# Altium PCB PCB1.PcbDoc
Units mil, origin at the board's own origin, x right, y up, seen from the top; angles counter-clockwise.
Board outline 2362.2 x 1338.58 mil, 2 copper layers (Top Layer, Bottom Layer); 19 components, 16 nets, 62 pads, 11 vias.
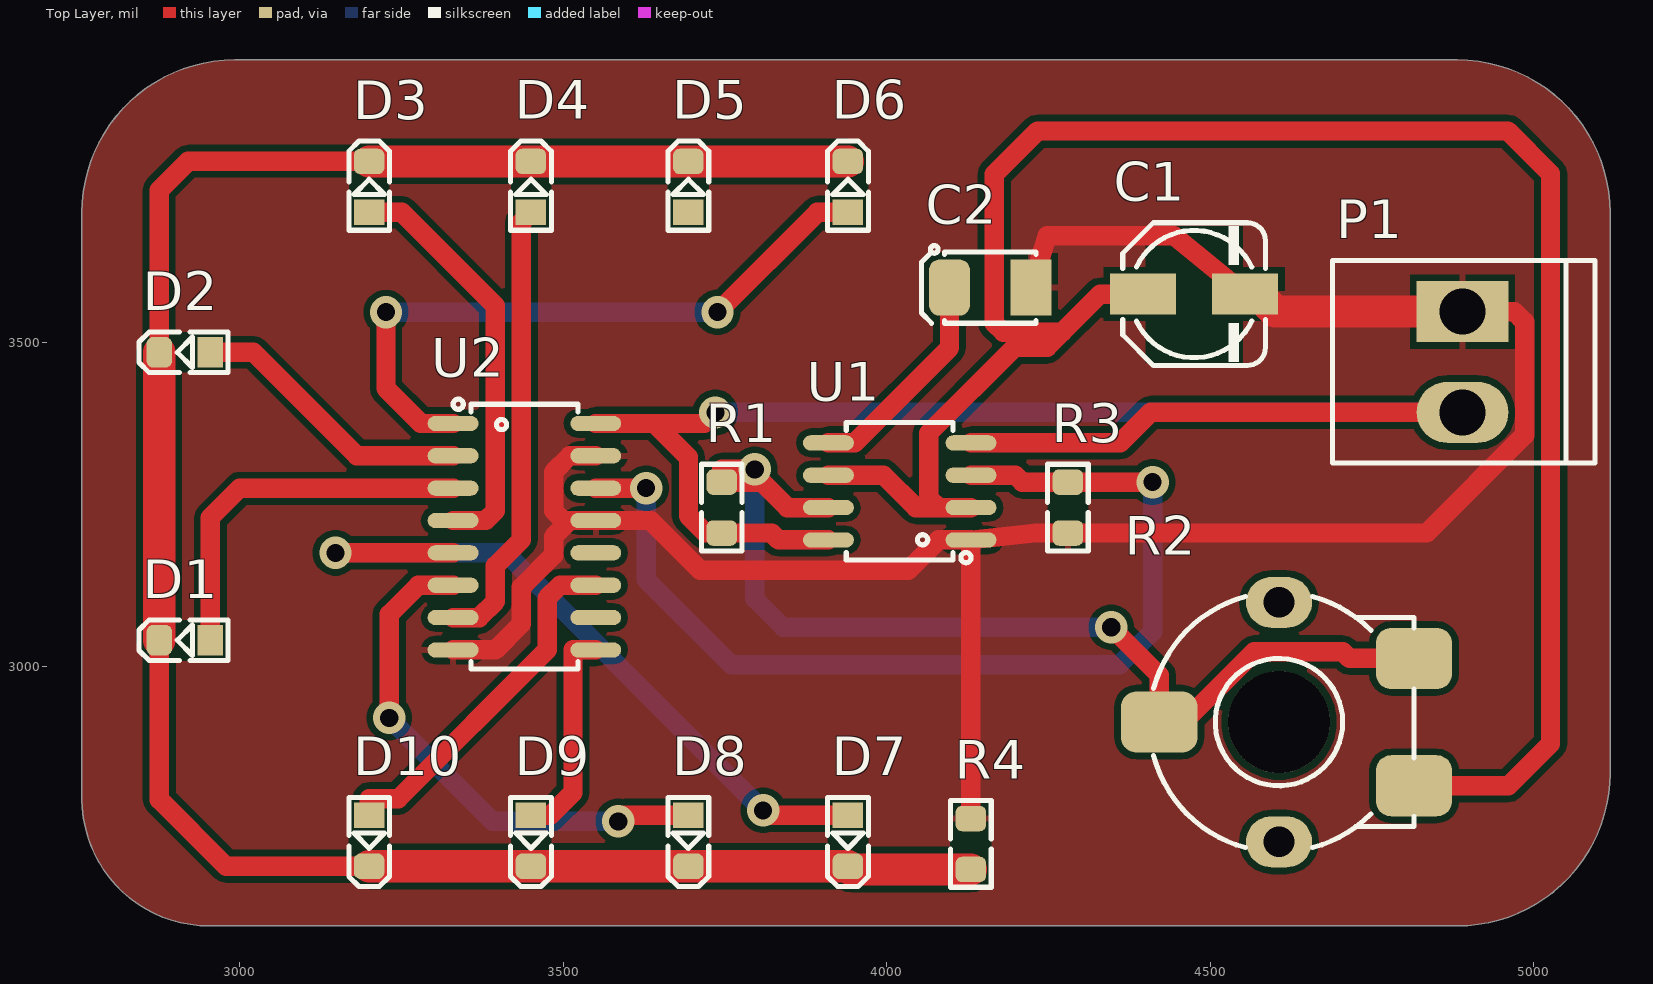
[diagram p0: Top Layer view]
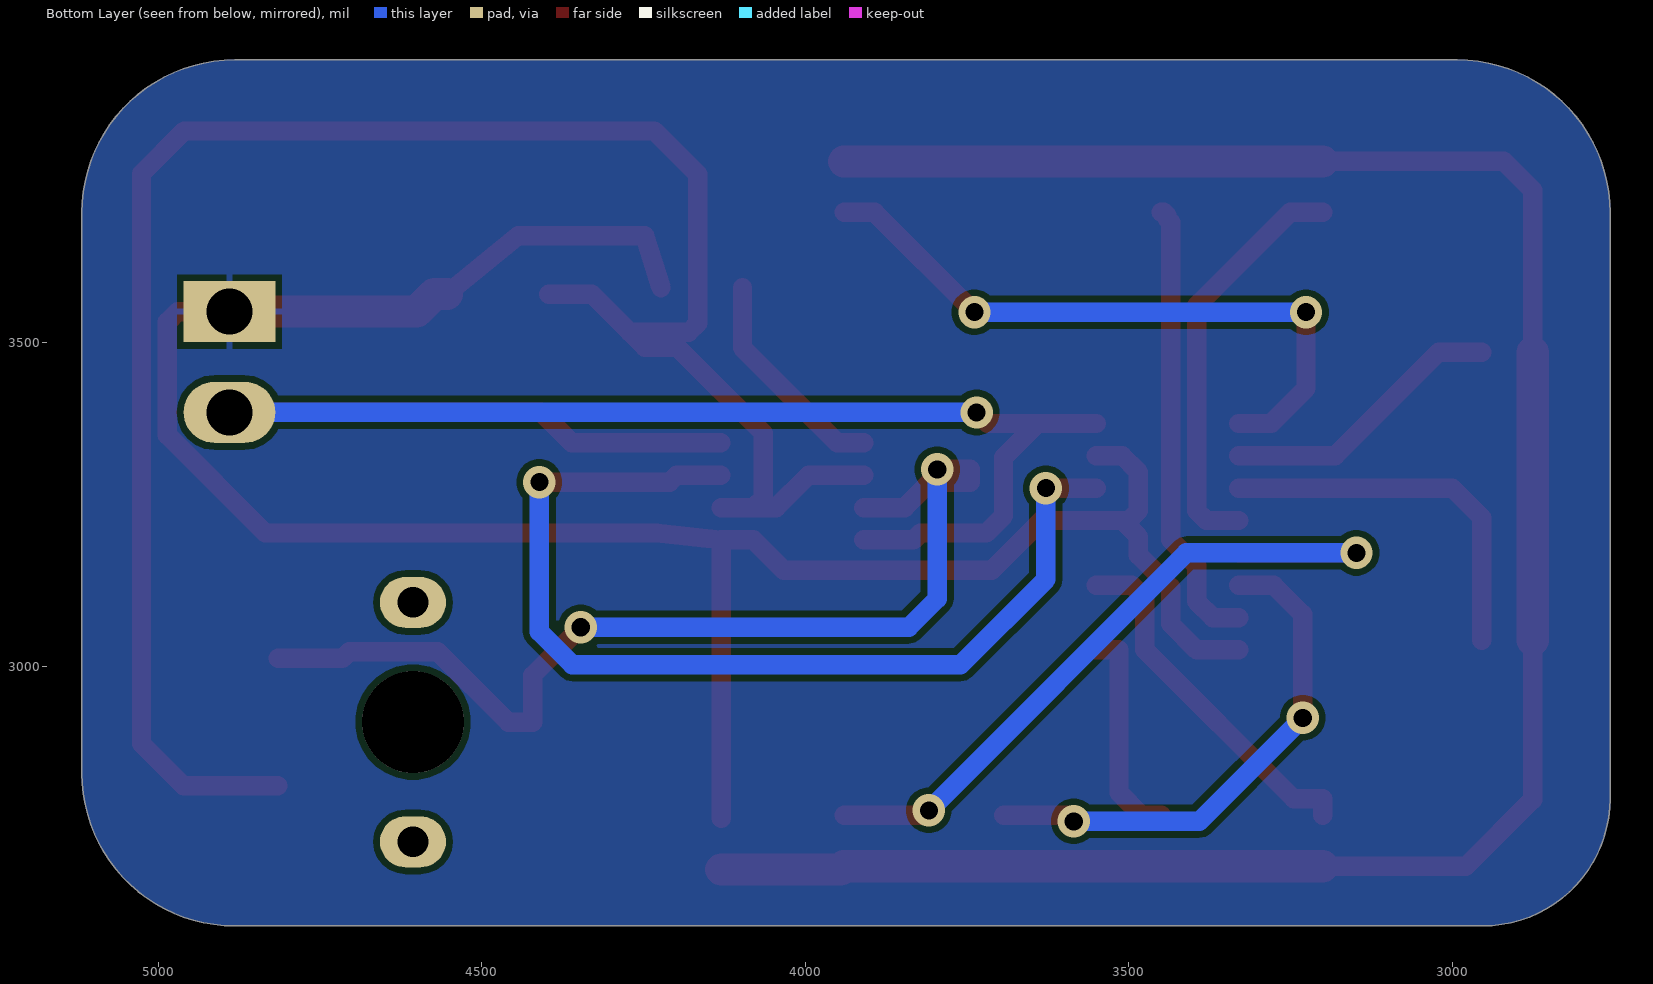
[diagram p1: Bottom Layer view, seen from below]
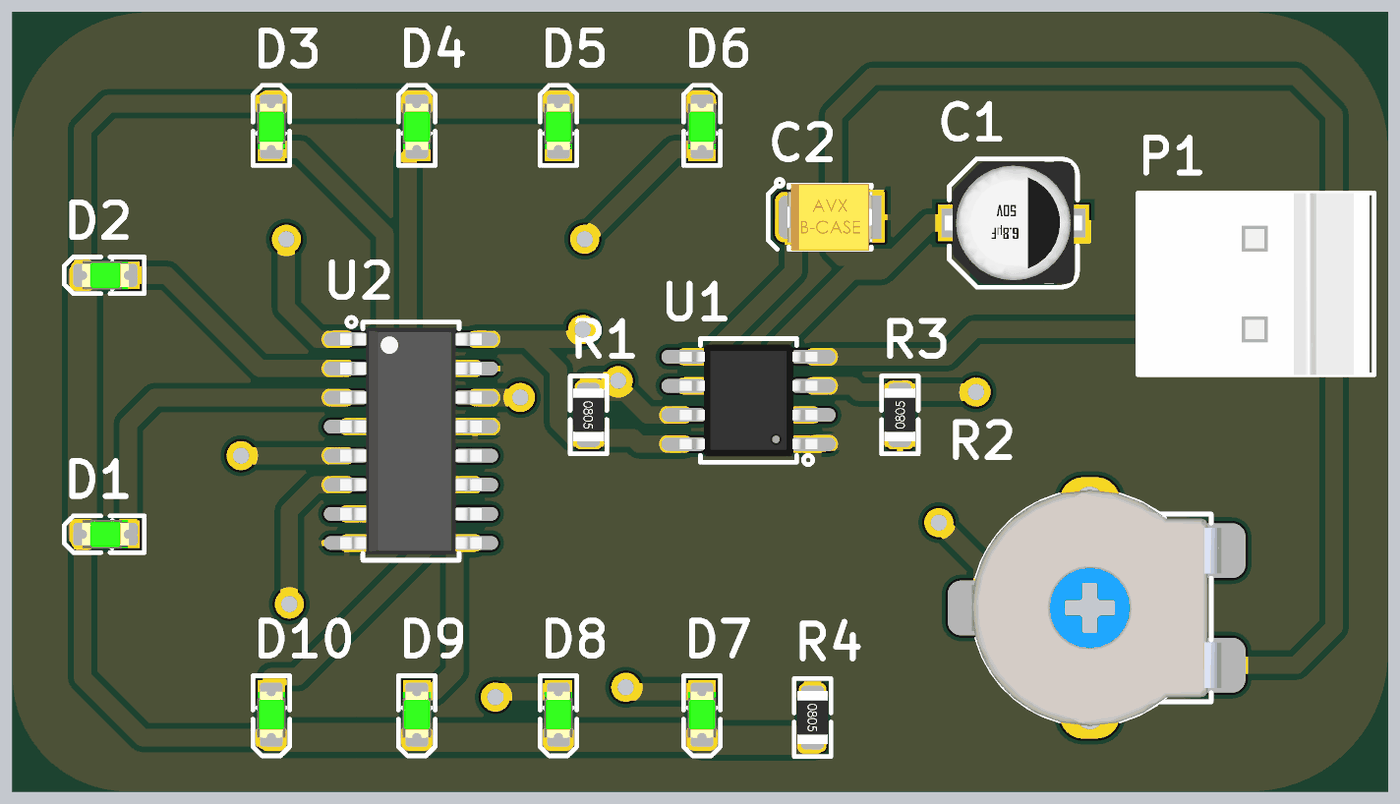
[diagram p2: 3D render of the assembled board from above, using the file's embedded part models]

## Layer stack, top to bottom
Top Solder: solder mask 0.4, Solder Resist, Dk 3.5
Top Layer: signal copper 1.4
Dielectric 1: dielectric 12.6, FR-4, Dk 4.8
Bottom Layer: signal copper 1.4
Bottom Solder: solder mask 0.4, Solder Resist, Dk 3.5

## Board outline
2952.76,2598.43 4881.89,2598.43 ccw(c4881.89,2834.65) 5118.11,2834.65 5118.11,3700.79 ccw(c4881.89,3700.79) 4881.89,3937.01 2992.13,3937.01 ccw(c2992.12,3700.79) 2755.91,3700.79 2755.91,2795.28 ccw(c2952.76,2795.27)

## Design rules (kind name [scope] priority, off if disabled: settings)
Clearance [All] p1: gap=10 ignorepadtopadclearanceinfootprint=FALSE
PolygonConnect [All] p1: connectstyle=Relief reliefconductorwidth=10 reliefentries=4 polygonreliefangle="90 Angle" airgapwidth=10
RoutingVias [All] p1: holewidth=28 width=50 viastyle="Through Hole" minholewidth=28 minwidth=50 maxholewidth=28 maxwidth=50
SolderMaskExpansion [All] p1: expansion=4 istentingtop=FALSE
SupplyNets "Schematic Supply Nets_1" [InNet('VCC')] p1: voltage=0.000
SupplyNets "Schematic Supply Nets" [InNet('GND')] p2: voltage=0.000
Width [All] p1: maxlimit=50 minlimit=10 preferedwidth=30 minimp=50.000000 maximp=50.000000 favimp=50.000000
30 further rules are at their usual default settings.

## Components (designator, comment, footprint, x,y, rotation, side; value= is the part's Value field where it differs from the comment)
C1 "22uF" C_EL_D5L5 4475,3575 r0 top
C2 "10nF" C_TN_3528 4160,3585 r0 top
D1 "LED0805" LED0805 2915,3040 r180 top
D2 "LED0805" LED0805 2915,3485 r180 top
D3 "LED0805" LED0805 3200,3740.63 r90 top
D4 "LED0805" LED0805 3450,3740.63 r90 top
D5 "LED0805" LED0805 3693.33,3740.63 r90 top
D6 "LED0805" LED0805 3940,3740.63 r90 top
D7 "LED0805" LED0805 3940,2730 r270 top
D8 "LED0805" LED0805 3693.33,2730 r270 top
D9 "LED0805" LED0805 3450,2730 r270 top
D10 "LED0805" LED0805 3200,2730 r270 top
P1 "CONN_PWL_2" PWL_2 4890,3470 r270 top
R1 "1M0" R0805 3745,3245 r270 top
R2 "POT50K" POTS_V10MM 4606.3,2913.39 r90 top
R3 "10K" R0805 4280,3245 r90 top
R4 "120 ohm" R0805 4130,2725 r270 top
U1 "LM555" SO_8 4020,3270 r180 top
U2 "74HC4017" SO_16 3440,3200 r0 top

## Footprints (in the part's own frame and the unit in brackets; to place one, negate y for a bottom-side part, rotate by r counter-clockwise, add the part's x,y. Pads: shape width x height; smd on the part's side, far side on the other; paste and mask are expansions set on the pad)
C_EL_D5L5 [mm] "Electrolytic Cap, D: 5.0mm, L: 5.4mm"
  rect 2.6x1.6 smd paste-0.161: 1(-2,0) 2(2,0)
  Top Layer pour cut-out: 1.905,2.667 1.905,-2.7 -1.905,-2.7 -1.905,2.667
  silkscreen extent -2.8,-2.8 2.8,2.8, body extent -3,-2.65 3,2.65
C_TN_3528 [mm] "CAPACITOR, TAN B, TAN H, TAN T, TAN M, 3528P, 1210P, 3.5X2.8mm"
  rrect50% 1.6x2.2 smd paste-0.152 mask+0.1: 1(-1.6,0)
  rect 1.6x2.2 smd paste-0.151 mask+0.1: 2(1.6,0)
  Top Layer pour cut-out: -0.889,1.4 -0.889,-1.4 0.889,-1.4 0.889,1.4
  silkscreen extent -2.7,-1.4 1.8,1.65, body extent -1.85,-1.46 1.85,1.47, height 2.03
LED0805 [mm] "LED SMD 0805"
  rect 1x1.2 smd paste-2 mask+0.075: 1(-1,0)
  rrect50% 1x1.2 smd paste-2 mask+0.075: 2(1,0)
  Top Layer pour cut-out: -0.5,0.8 0.5,0.8 0.5,-0.8 -0.5,-0.8
  silkscreen extent -1.7,-0.8 1.8,0.8, body extent -1.01,-0.62 1.01,0.63, height 1.1
POTS_V10MM [mm] "POT, TRIM, V-10 10mm SMD"
  rrect50% 2.4x3 smd: 1(-2.5,-5.3) 2(0,4.7) 3(2.5,-5.3)
  oval 2x2.6 hole 1.2: ""(-4.7,0) ""(4.7,0)
  round 4 hole 4 unplated mask+0.1: ""(0,0)
  silkscreen extent -4.93,-5.3 4.93,4.93, body extent -5.15,-5.74 5.15,5.15, height 5.7
PWL_2 [mm] "Connector; Header; 2 Position"
  rect 2.4x3.6 hole 1.8: 1(-1.98,0)
  oval 2.4x3.6 hole 1.8: 2(1.98,0)
  silkscreen extent -3.98,-5.1 3.96,5.21, body extent -3.96,-5 3.96,5, height 13.5
R0805 [mm] "CHIP RESISTOR 1/8 WATT ,2.0X1.3mm, 0805, 2012"
  rrect50% 1x1.2 smd paste-0.1 mask+0.075: 1(-1,0) 2(1,0)
  Top Layer pour cut-out: -0.5,0.8 0.5,0.8 0.5,-0.8 -0.5,-0.8
  silkscreen extent -1.7,-0.8 1.7,0.8, body extent -1.15,-0.67 1.15,0.68, height 0.76
SO_8 [mm] "SOP-8, 5x3.9mm body 1.27mm pitch, SOT96-1, M08A, S8, SOIC8, VO8, MS-012AA(JEDEC), R-8, 8S2, VOG8"
  oval 2x0.6 smd: 1(-2.8,1.905) 2(-2.8,0.635) 3(-2.8,-0.635) 4(-2.8,-1.905) 5(2.8,-1.905) 6(2.8,-0.635) 7(2.8,0.635) 8(2.8,1.905)
  silkscreen extent -2.8,-2.7 2.1,2.8, body extent -3,-2.45 3,2.45, height 1.7
SO_16 [mm] "SOP, SOIC, 3.9mm width, 1.27mm pitch,"
  oval 2x0.6 smd: 1(-2.8,4.445) 2(-2.8,3.175) 3(-2.8,1.905) 4(-2.8,0.635) 5(-2.8,-0.635) 6(-2.8,-1.905) 7(-2.8,-3.175) 8(-2.8,-4.445) 9(2.8,-4.445) 10(2.8,-3.175) 11(2.8,-1.905) 12(2.8,-0.635) 13(2.8,0.635) 14(2.8,1.905) 15(2.8,3.175) 16(2.8,4.445)
  silkscreen extent -2.8,-5.2 2.1,5.4, body extent -3.1,-4.95 3.1,4.95, height 1.7

## Part data
C1: library part CAP_SMD_EL, "CAP, SMD, ELEC,", ASSEMBLY=ASSEMBLY, DESC=DESCRIPTION, DIST#=MOUSER, MANF=MANF, MANF_P#=MANF_PART#, PARAM=20%, PARAM2=-V, PRICE="10= -$"
C2: library part CAP_SMD_TAN, "CAP, SMD, TAN", MANF=VISHAY, MANF_P#=T55A106M6R3C0300, PARAM="20%, 300mOhm, -55~105oC", PARAM2=6.3V, PRICE=0.46$
D1 D2 D3 D4 D5 D6 D7 D8 D9 D10: library part LED_SMD_0805, "LED, SMD, 0805", ASSEMBLY=ASSEMBLY, DESC=DESCRIPTION, MANF=MANF, MANF_P#=MANF_PART#, PARAM2=2.2V, PRICE=PRICE
P1: "Power Terminal 2pin,Header, 2-Pin"
R1 R3 R4: library part RES_SMD_0805, "RESISTOR, SMD", ASSEMBLY=ASSEMBLY, DESC=DESCRIPTION, DIST#=MOUSER, MANF=-, MANF_P#=-, PARAM=-W, PARAM2=1%, PRICE="100= 0.5$"
R2: library part RES_SMD_POT_V10, "RESISTOR, SMD, Potentiometer, 10mm"
U1: library part LM555C_SOP8, "555 Timer,", MANF="Texas Instruments", MANF_P#="LM555CMX, LMC555CM", PARAM="200mA output, 0~70oC", PARAM2=4.5~16V
U2: library part 74HC4017_SOP16, "Counter, 10 decoded output", MANF="NXP, TI", MANF_P#="74HC4017D, CD74HC4017M", PARAM=-55~125oC, PARAM2=2~6V, PRICE=0.5$

## Via types
v1: diameter 50, hole 28, Top Layer to Bottom Layer, 11 vias

## Nets (pads, with @x,y where several pads share a name; then routed paths per layer and width w, separated by ;. In a path a pad name is that pad's centre, name@x,y a point inside that pad or via, vN(x,y) a via of type N, cw(c..) or ccw(c..) an arc to the next point about the centre after c; other vN are vias at no path point)
GND: C1.2 C2.2 P1.1 R3.1 R4.1 U1.1 U2.8 U2.13 U2.15 | length 3547.7
  Top Layer w30: U2.8 3395,3025 3435,3065 3435,3121.57 3485,3171.57 3485,3200 3510,3225 ; U2.15 3510,3325 3485,3300 3485,3240 3500,3225 3510,3225 ; R4.1 U1.1@4130,3195 ; C2.2 4247.99,3665 4444.05,3665 C1.2 ; P1.1 4970,3547.95 4986,3531.95 4986,3357 4834.63,3205.63 R3.1 4229.25,3205.63 U1.1 U1.1@4130,3195 ; 3510,3225 U2.13 3635,3225 3712,3148 4033,3148 4080,3195 U1.1@4130,3195
  Top Layer w50: C1.2 4573.43,3575 4600.47,3547.95 P1.1
NetC1_1: C1.1 R2.1 U1.2 U1.6 | length 3157.6
  Top Layer w30: U1.6 3995,3295 4045,3245 4080,3245 ; U1.2 4080,3245 ; C1.1 4330,3575 4271,3516 ; R2.1 4960.96,2814.96 5026,2880 5026,3761 4960,3827 4233,3827 4166,3760 4166,3530 4180,3516 4271,3516 ; 4080,3245 4065,3260 4065,3360 4198,3493 4248,3493 4271,3516
NetC2_1: C2.1 U1.5 | length 341.3
  Top Layer w30: U1.5 3950.27,3345 4097.01,3491.74 C2.1
NetD1_1: D1.1 U2.3 | length 583.7
  Top Layer w30: D1.1 2954.37,3229.37 3000,3275 U2.3
NetD1_2: D1.2 D2.2 D3.2 D4.2 D5.2 D6.2 D7.2 D8.2 D9.2 D10.2 R4.2 | length 3323.8
  Top Layer w30: D1.2 2875.63,2793.66 2978.66,2690.63 D10.2 ; D2.2 2875.63,3735.63 2920,3780 D3.2
  Top Layer w50: D1.2 D2.2 ; D10.2 D9.2 D8.2 D7.2 3945,2685.63 R4.2 ; D3.2 D4.2 D5.2 D6.2
NetD2_1: D2.1 U2.2 | length 441.7
  Top Layer w30: D2.1 3021,3485 3181,3325 U2.2
NetD3_1: D3.1 U2.4 | length 643.1
  Top Layer w30: D3.1 3250.58,3701.26 3395,3556.84 3395,3240 3380,3225 U2.4
NetD4_1: D4.1 U2.7 | length 701.9
  Top Layer w30: U2.7 3370,3075 3395,3100 3395,3155 3435,3195 3435,3686.26 3441.38,3692.64 3441.38,3696.57 3446.06,3701.26 D4.1
NetD6_1: D6.1 U2.1 | length 1022
  Top Layer w30: v1(3226,3547) 3226,3429 3280,3375 U2.1 ; v1(3738.44,3547) 3892.7,3701.26 D6.1
  Bottom Layer w30: v1(3226,3547) v1(3738.44,3547)
NetD7_1: D7.1 U2.5 | length 1141.8
  Top Layer w30: v1(3148,3175) U2.5 ; v1(3809,2777) 3816.63,2769.37 D7.1
  Bottom Layer w30: v1(3148,3175) 3411,3175 v1(3809,2777)
NetD8_1: D8.1 U2.6 | length 809.9
  Top Layer w30: v1(3231,2920) 3231,3080 3276,3125 U2.6 ; v1(3585,2760) 3594.37,2769.37 D8.1
  Bottom Layer w30: v1(3231,2920) 3391,2760 v1(3585,2760)
NetD9_1: D9.1 U2.9 | length 335.4
  Top Layer w30: D9.1 3480,2769.37 3515,2804.37 3515,3025 U2.9
NetD10_1: D10.1 U2.11 | length 559.4
  Top Layer w30: D10.1 3200,2795 3245,2795 3475,3025 3475,3105 3495,3125 U2.11
NetR1_1: R1.1 R2.2 R2.3 U1.7 | length 1641.2
  Top Layer w30: v1(3796,3304) 3745,3304 R1.1 3807,3284.37 3846.37,3245 U1.7 ; v1(4347,3060) 4421.26,2985.74 R2.2 4459,2913.39 4567.61,3022 4705,3022 4715.19,3011.81 R2.3
  Bottom Layer w30: v1(3796,3304) 3796,3104 3840,3060 v1(4347,3060)
NetR3_2: R3.2 U1.3 U2.14 | length 1594.1
  Top Layer w30: U2.14 v1(3628,3275) ; U1.3 4199,3295 4209.63,3284.37 R3.2 v1(4411,3284.37)
  Bottom Layer w30: v1(3628,3275) 3628,3134 3760,3002 4360,3002 4411,3053 v1(4411,3284.37)
VCC: P1.2 R1.2 U1.4 U1.8 U2.16 | length 2522.3
  Top Layer w30: U2.16 3641,3375 ; v1(3735.05,3392.05) 3718,3375 3641,3375 ; U1.8 3832.63,3195 3822,3205.63 R1.2 3720,3205.63 3693.53,3232.1 3693.53,3322.47 3641,3375 ; U1.4 4360.72,3345 4407.77,3392.05 P1.2
  Bottom Layer w30: v1(3735.05,3392.05) P1.2
pads on no net: D5.1 R2. U2.10 U2.12

## Polygon pours and split planes (outlines as drawn)
GND on Bottom Layer "GND_L02_P002" (solid, pour order 2): 2952.76,2598.43 4881.89,2598.43 ccw(c4881.89,2834.65) 5118.11,2834.65 5118.11,3700.79 ccw(c4881.89,3700.79) 4881.89,3937.01 2992.13,3937.01 ccw(c2992.12,3700.79) 2755.91,3700.79 2755.91,2795.28 ccw(c2952.76,2795.27)
GND on Top Layer "GND_L01_P003" (solid, pour order 3): 2952.76,2598.43 4881.89,2598.43 ccw(c4881.89,2834.65) 5118.11,2834.65 5118.11,3700.79 ccw(c4881.89,3700.79) 4881.89,3937.01 2992.13,3937.01 ccw(c2992.12,3700.79) 2755.91,3700.79 2755.91,2795.28 ccw(c2952.76,2795.27)